# EAGLE board LEDtemplate (EAGLE 6.6.0)

Size 203.2 x 277.81 mm. Coordinates in mm from the lower left corner, seen from the top.
Outline: 203.2,277.81 203.2,139.7 0,139.7 0,277.81
Outline: 203.2,277.81 0,277.81
Outline: 0,0 0,138.11 173.04,138.11 173.04,0 0,0
Outline: 0,0 203.2,0 203.2,277.81
Outline: 203.2,277.81 0,277.81
Outline: 0,277.81 0,0
Copper layers (1*16): Top 0.035mm / dielectric 1.5mm / Bottom 0.035mm
Design rules "15mils": minimum track width 15mil, minimum drill 24mil, track to track 15mil, track to pad 10mil, pad to pad 10mil, via to via 10mil, smd to smd 10mil, copper to edge 25mil, drill to drill 10mil, minimum pad ring 10mil, minimum via ring 8mil, stop-mask expansion 0mil, vias tented up to drill 0mil, thermal gap 10mil
Net classes: 1 supply: width 0.762 mm

## Footprints (pad centres in the part's own frame; a part is rotated, then mirrored left to right if it is on the bottom)
STRAIN-RELIEF = hole 3.175: 7.62,56.515; 7.62,5.715
3,6 = hole 3.6: 0,0

## Placement (x,y rotation side)
U$1  [STRAIN-RELIEF]  74.61,125.41 90 top
U$2  [STRAIN-RELIEF]  160.34,125.41 90 top
U$3  [STRAIN-RELIEF]  71.44,265.11 90 top
U$4  [STRAIN-RELIEF]  185.74,265.11 90 top
U$5  [3,6]  196.85,255.59 0 top
U$6  [3,6]  196.85,177.8 0 top
U$7  [3,6]  11.11,177.8 0 top
U$8  [3,6]  14.29,38.1 0 top
U$9  [3,6]  14.29,115.89 0 top
U$11  [3,6]  157.16,115.89 0 top

## Library data of the parts
U$1-U$4 = dec-con
U$5-U$9 U$11 = holes